# Altium PCB PCB2.PcbDoc
Units mil, origin at the board's own origin, x right, y up, seen from the top; angles counter-clockwise.
Board outline 1580 x 2895 mil, 2 copper layers (Top Layer, Bottom Layer); 23 components, 53 nets, 148 pads, 8 vias.
Unrouted connection lines stored in the file: 27.
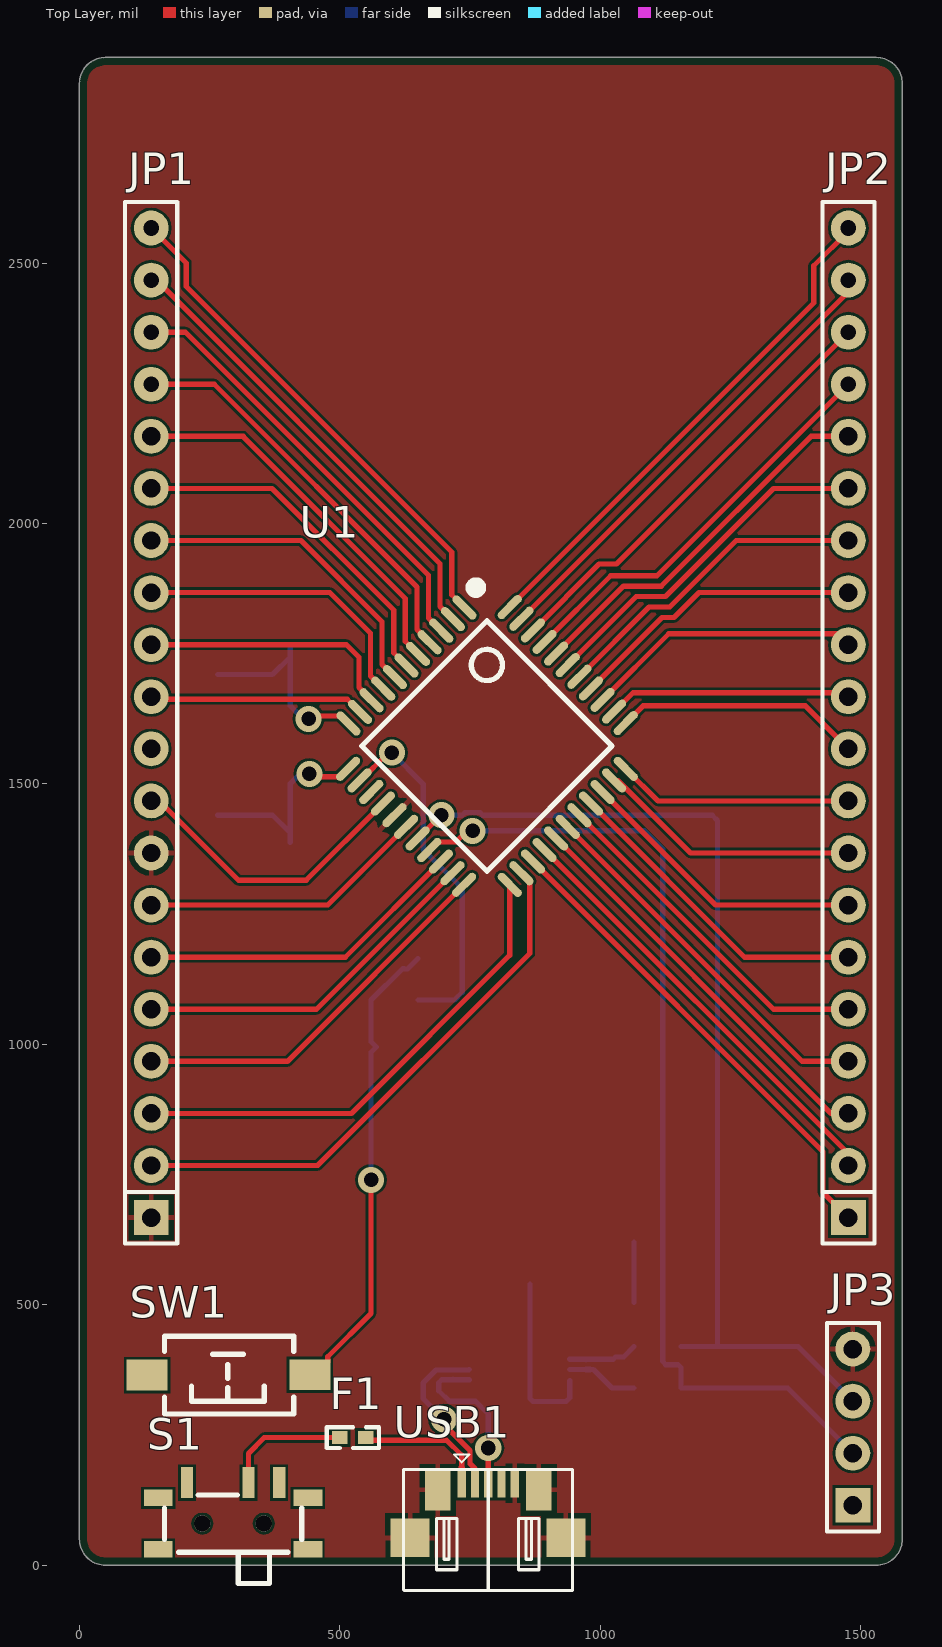
[diagram p0: Top Layer view]
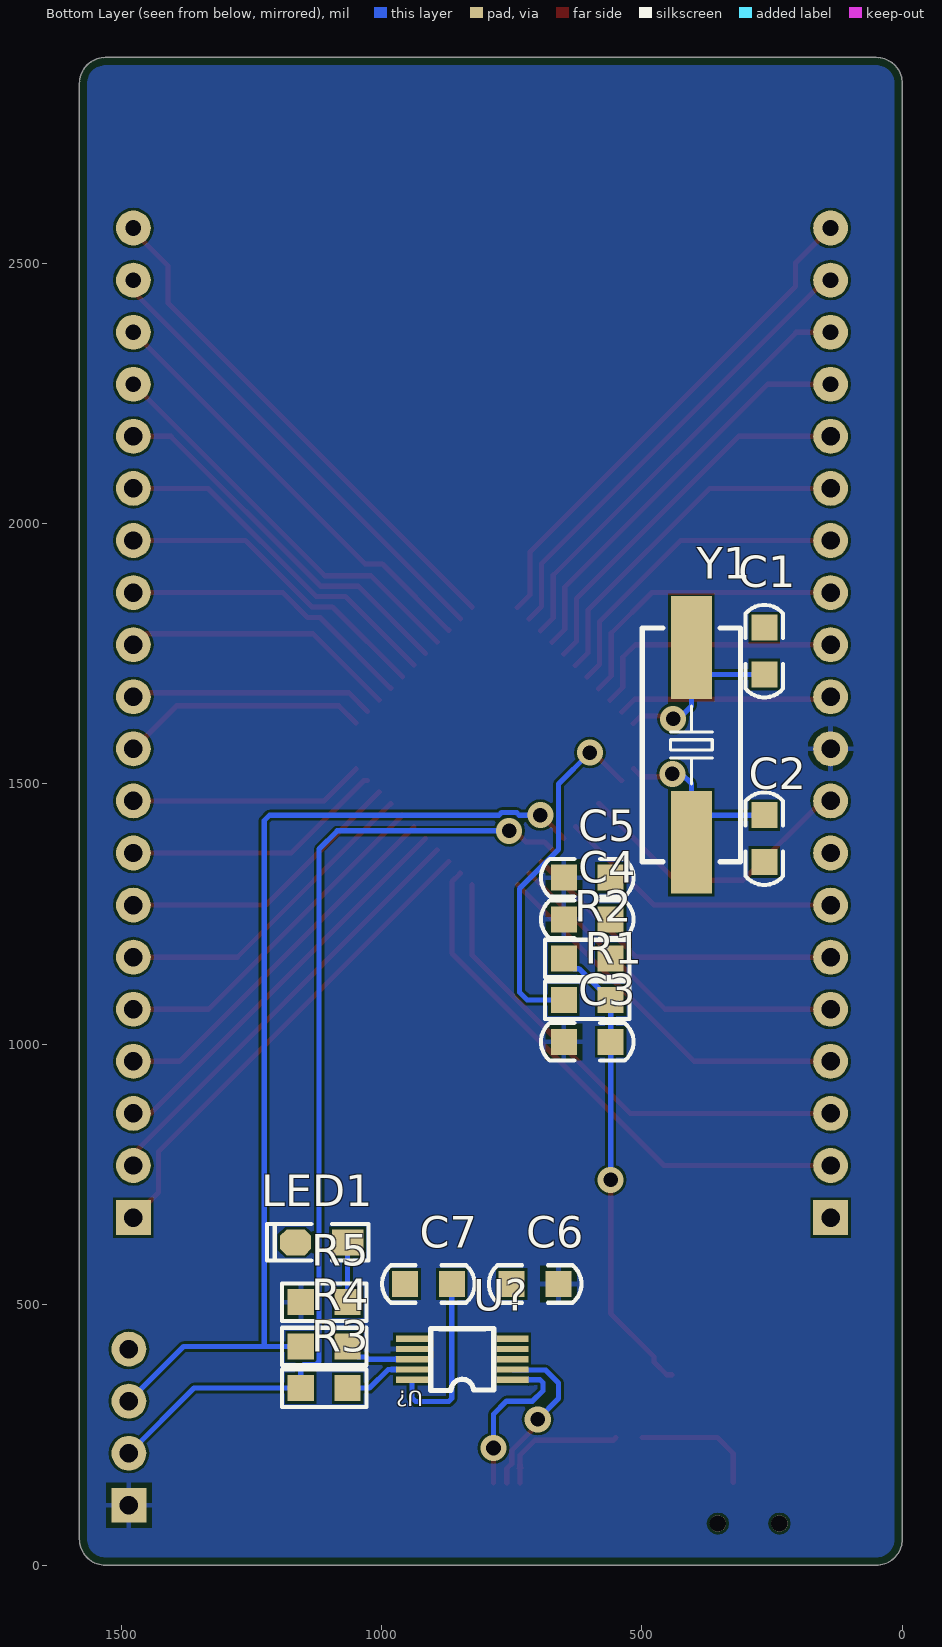
[diagram p1: Bottom Layer view, seen from below]

## Layer stack, top to bottom
Top Solder: solder mask 0.4, Solder Resist, Dk 3.5
Top Layer: signal copper 1.4
Dielectric 1: dielectric 12.6, FR-4, Dk 4.8
Bottom Layer: signal copper 1.4
Bottom Solder: solder mask 0.4, Solder Resist, Dk 3.5

## Board outline
0,50 0,2845 cw(c50,2845) 50,2895 1530,2895 cw(c1530,2845) 1580,2845 1580,50 cw(c1530,50) 1530,0 50,0 cw(c50,50)

## Design rules (kind name [scope] priority, off if disabled: settings)
BoardOutlineClearance [All] p1: gap=15 ignorepadtopadclearanceinfootprint=FALSE
Clearance [All] p1: gap=5 ignorepadtopadclearanceinfootprint=FALSE
PolygonConnect [All] p1: connectstyle=Relief reliefconductorwidth=10 reliefentries=4 polygonreliefangle="90 Angle" airgapwidth=10
RoutingVias [All] p1: holewidth=28 width=50 viastyle="Through Hole" minholewidth=28 minwidth=50 maxholewidth=28 maxwidth=50
SolderMaskExpansion [All] p1: expansion=4
Width [All] p1: maxlimit=10 minlimit=10 preferedwidth=10
30 further rules are at their usual default settings.

## Components (designator, comment, footprint, x,y, rotation, side; value= is the part's Value field where it differs from the comment)
C1 "22pF" "C 0805" 265,1755 r270 bottom
C2 "22pF" "C 0805" 265,1395 r90 bottom
C3 "0.1uF" "C 0805" 605,1005 r0 bottom
C4 "47pF" "C 0805" 605,1240 r0 bottom
C5 "0.1uF" "C 0805" 605,1320 r0 bottom
C6 "10uF" "C 0805" 705,540 r0 bottom
C7 "100nF" "C 0805" 910,540 r0 bottom
F1 "MSMD200-8V 2A" "FU 0402" 525,245 r180 top
JP1 "HDR-1X20" HDR-1X20 137.8,667.44 r90 top
JP2 "HDR-1X20" HDR-1X20 1476.38,667.44 r90 top
JP3 "HDR-1X4" HDR-1X4 1485,115 r90 top
LED1 "红色" "LED 0805G" 1115,620 r0 bottom
R1 "300R" "R 0805" 605,1085 r180 bottom
R2 "10K" "R 0805" 605,1165 r180 bottom
R3 "1K" "R 0805" 1110,340 r0 bottom
R4 "1K" "R 0805" 1110,420 r0 bottom
R5 "1K" "R 0805" 1110,505 r180 bottom
S1 "SS-12F23" MSK-12C01-07 295,80 r0 top
SW1 "3x6x5" "TSW SMD-3*6*2.5" 285,365 r180 top
U1 "STC15F2K60S2" "LQFP44 10X10_L" 782.4,1572.95 r225 top
U? "CH340E" CH340E 845,395 r0 bottom
USB1 "USB-Micro" USB-MICRO_A 785,65 r0 top
Y1 "12MHz" "OSC HC-49SMD" 405,1575 r90 bottom

## Footprints (in the part's own frame and the unit in brackets; to place one, negate y for a bottom-side part, rotate by r counter-clockwise, add the part's x,y. Pads: shape width x height; smd on the part's side, far side on the other; paste and mask are expansions set on the pad)
"C 0805" [mil] "无极性贴片电容"
  rect 50x50 smd: 1(-45,0) 2(45,0)
  silkscreen extent -89,-36 89,36, body extent -39,-24 39,24, height 20
CH340E [mil]
  rect 61.02x12 smd: 1(-96.5,38.87) 2(-96.5,19.18) 3(-96.5,-0.5) 4(-96.5,-20.19) 5(-96.5,-39.87) 6(96.5,-39.87) 7(96.5,-20.19) 8(96.5,-0.5) 9(96.5,19.18) 10(96.5,38.87)
  silkscreen extent -60,-60 60,60
"FU 0402" [mil] "贴片保险丝"
  rect 30x25 smd: 1(-25,0) 2(25,0)
  silkscreen extent -50,-20 50,20, body extent -20,-10 20,10, height 15
HDR-1X4 [mm] "排针，4脚"
  rect 1.7x1.7 hole 0.9: 1(0,0)
  round 1.7 hole 0.9: 2(2.54,0) 3(5.08,0) 4(7.62,0)
  silkscreen extent -1.27,-1.27 8.89,1.27, body extent -1.27,-1.27 8.89,1.27, height 8.5
HDR-1X20 [mm] "排针，20脚"
  rect 1.7x1.7 hole 0.9: 1(0,0)
  round 1.7 hole 0.9: 2(2.54,0) 3(5.08,0) 4(7.62,0) 5(10.16,0) 6(12.7,0) 7(15.24,0) 8(17.78,0) 9(20.32,0) 10(22.86,0) 11(25.4,0) 12(27.94,0) 13(30.48,0) 14(33.02,0) 15(35.56,0) 16(38.1,0)
  round 1.7 hole 0.762: 17(40.64,0) 18(43.18,0) 19(45.72,0) 20(48.26,0)
  silkscreen extent -1.27,-1.27 49.53,1.27, body extent -1.27,-1.27 49.53,1.27, height 8.5
"LED 0805G" [mil] "绿色0805LED"
  rect 60x50 smd: 1(-50,0)
  oct 60x50 smd: 2(50,0)
  silkscreen extent -90,-35 105,35, body extent -39,-25 39,25, height 32
"LQFP44 10X10_L" [mm] "44脚，体宽10x10mm，脚距0.8mm"
  oval 0.4x1.5 smd: 1(-4,-5.551) 2(-3.2,-5.551) 3(-2.4,-5.551) 4(-1.6,-5.551) 5(-0.8,-5.551) 6(0,-5.551) 7(0.8,-5.551) 8(1.6,-5.551) 9(2.4,-5.551) 10(3.2,-5.551) 11(4,-5.551) 23(4,5.578) 24(3.2,5.578) 25(2.4,5.578) 26(1.6,5.578) 27(0.8,5.578) 28(0,5.578) 29(-0.8,5.578) 30(-1.6,5.578) 31(-2.4,5.578) 32(-3.2,5.578) 33(-4,5.578)
  oval 1.5x0.4 smd: 12(5.575,-4) 13(5.575,-3.2) 14(5.575,-2.4) 15(5.575,-1.6) 16(5.575,-0.8) 17(5.575,0) 18(5.575,0.8) 19(5.575,1.6) 20(5.575,2.4) 21(5.575,3.2) 22(5.575,4) 34(-5.575,4) 35(-5.575,3.2) 36(-5.575,2.4) 37(-5.575,1.6) 38(-5.575,0.8) 39(-5.575,0) 40(-5.575,-0.8) 41(-5.575,-1.6) 42(-5.575,-2.4) 43(-5.575,-3.2) 44(-5.575,-4)
  silkscreen extent -5.33,-6.09 4.32,4.32, body extent -6,-6 6,6, height 1.45
MSK-12C01-07 [mm] "6.7*2.8*1.5mm(长宽高）"
  rect 1.4x0.8 smd: 0(-3.65,-1.25) 0(-3.65,1.25) 0(3.65,-1.25) 0(3.65,1.25)
  rect 0.6x1.5 smd: 1(-2.25,1.996) 2(0.75,1.996) 3(2.25,1.996)
  round 0.8 hole 0.8: " "(-1.5,0) " "(1.5,0)
  silkscreen extent -3.35,-2.92 3.35,1.4, body extent -3.92,-2.9 3.92,2.4, height 1.5
"OSC HC-49SMD" [mm]
  rect 5x2 smd: 1(-4.75,0) 2(4.75,0)
  silkscreen extent -5.7,-2.4 5.7,2.4, body extent -6.5,-2.33 6.5,2.32, height 4.63
"R 0805" [mil] "1/8W贴片电阻"
  rect 50x50 smd: 1(-45,0) 2(45,0)
  silkscreen extent -81,-36 81,36, body extent -39,-25 39,25, height 20
"TSW SMD-3*6*2.5" [mm] "3*6*2.5mm"
  rect 2x1.5 smd: 1(-3.996,-0.02) 2(3.937,0)
  silkscreen extent -3.21,-1.9 3.09,1.9, body extent -4,-1.88 4,1.62, height 2.59
USB-MICRO_A [mm] "micro型USB ，5.9*8.2*2.5mm"
  rect 0.4x1.4 smd: 1(-1.296,2.355) 2(-0.648,2.355) 3(0,2.355) 4(0.648,2.355) 5(1.295,2.355)
  rect 1.9x1.9 smd: 5(-3.81,-0.312) 5(3.784,-0.312)
  rect 1.25x2 smd: 5(-2.464,2.025) 5(2.464,2.025)
  silkscreen extent -4.14,-2.89 4.11,3.75, body extent -3.98,-2.77 3.98,2.65, height 2.69

## Part data
C1 C2 C3 C4 C5 C6 C7: library part C, "无极性贴片电容"
F1: library part FU, "贴片保险丝"
JP1 JP2: library part "Header 20", "20P接插件", BOM名称=20P, 学习资源=https://lmdzstyle.taoba
JP3: library part "Header 4", "4P接插件"
LED1: library part LED-SMD, "贴片LED", BOM名称=Ì, 学习资源=https://lmdzstyle.taoba
R1 R2 R3 R4 R5: library part R, "贴片电阻"
S1: library part SSW-1P, "1路波动开关", BOM名称=², 学习资源=https://lmdzstyle.taoba
SW1: library part "TSW 3x6", "3x6轻触开关", BOM名称=3x6Ç, 学习资源=https://lmdzstyle.taoba
U1: library part STC15F2K60S2-44pin, "STC单片机"
Y1: library part XTAL-2P, "2脚无源脚晶振", BOM名称=2脚, 学习资源=www.oooc
USB1: BOM名称=USBMic

## Via types
v1: diameter 50, hole 28, Top Layer to Bottom Layer, 8 vias

## Nets (pads, with @x,y where several pads share a name; then routed paths per layer and width w, separated by ;. In a path a pad name is that pad's centre, name@x,y a point inside that pad or via, vN(x,y) a via of type N, cw(c..) or ccw(c..) an arc to the next point about the centre after c; other vN are vias at no path point)
+5: C3.2 C4.2 C5.2 C6.1 JP1.10 JP3.1 R5.1 S1.1 SW1.2 U1.14 U?.7
D+: U?.1 USB1.3 | length 322.1
  Top Layer w10: USB1.3 v1(785,225)
  Bottom Layer w10: U?.1 695.86,356.13 690,350.27 690,335 710,315 760,315 785,290 v1(785,225)
D-: U?.2 USB1.2 | length 332.7
  Top Layer w10: v1(700,280) 700,270 750,220 750,195 759.49,185.51 USB1.2
  Bottom Layer w10: v1(700,280) 660,320 660,350 684.82,374.82 747.5,374.82 U?.2
GND: C1.1 C2.1 C4.1 C5.1 C6.2 C7.2 JP1.1 JP1.8 JP3.4 LED1.2 R2.2 U1.16 U?.3 USB1.5
NetC1_2: C1.2 U1.11 Y1.2 | length 396.2
  Top Layer w10: v1(440,1625) 445.34,1630.34 502.31,1630.34 U1.11
  Bottom Layer w10: C1.2 370.63,1710 Y1.2@405,1744.37 ; Y1.2 Y1.2@405,1744.37 ; v1(440,1625) 430,1625 405,1650 Y1.2@405,1744.37
NetC2_2: C2.2 U1.12 Y1.1 | length 394.2
  Top Layer w10: v1(441.42,1519.4) 447.02,1513.81 500.54,1513.81 U1.12
  Bottom Layer w10: C2.2 370.63,1440 Y1.1@405,1405.63 ; Y1.1 Y1.1@405,1405.63 ; v1(441.42,1519.4) 423.74,1519.4 405,1500.66 Y1.1@405,1405.63
NetC3_1: C3.1 R1.2 R2.1 SW1.1 | length 905.1
  Top Layer w10: SW1.1 452.16,365.79 476.68,390.31 476.68,400.16 560,483.47 v1(560,740)
  Bottom Layer w10: v1(560,740) 560,985 570,995 C3.1 R1.2 620,1145 630,1145 R2.1
NetC7_1: C7.1 U?.10 | length 335.3
  Bottom Layer w10: C7.1 865,320 870.86,314.14 934.14,314.14 941.5,321.5 U?.10@941.5,354.82
NetF1_1: F1.1 USB1.1 | length 251.4
  Top Layer w10: F1.1 555,240 705,240 733.99,211.01 USB1.1
NetF1_2: F1.2 S1.2 | length 244
  Top Layer w10: S1.2 324.53,214.53 355,245 F1.2
NetLED1_1: LED1.1 R5.2 | length 115
  Bottom Layer w10: R5.2 LED1.1
NetR1_1: R1.1 U1.13 | length 691
  Top Layer w10: U1.13 539.68,1506.85 592.84,1560 v1(600,1560)
  Bottom Layer w10: v1(600,1560) 660,1500 660,1374.14 735,1299.14 735,1100 720,1085 R1.1
NetR3_1: R3.1 U?.9 | length 138.3
  Bottom Layer w10: U?.9 987.01,375.82 1022.83,340 R3.1
NetR4_1: R4.1 U?.8 | length 133.6
  Bottom Layer w10: U?.8 1025,395.5 1029.5,400 1045,400 R4.1
P0_0: JP2.16 U1.40 | length 733.8
  Top Layer w10: U1.40 1044.72,1879.82 1117.04,1879.82 1404.66,2167.44 JP2.16
P0_1: JP2.17 U1.41 | length 788.3
  Top Layer w10: U1.41 1020.18,1899.82 1108.75,1899.82 JP2.17
P0_2: JP2.18 U1.42 | length 842.7
  Top Layer w10: U1.42 997.91,1922.09 1031.03,1922.09 JP2.18
P0_3: JP2.19 U1.43 | length 910.3
  Top Layer w10: U1.43 1476.38,2445.1 JP2.19
P0_4: JP2.20 U1.44 | length 1008.6
  Top Layer w10: U1.44 1410,2423.26 1410,2495 JP2.20@1476.38,2561.38 ; JP2.20@1476.38,2550 JP2.20@1476.38,2561.38 ; JP2.20 JP2.20@1476.38,2561.38
P0_5: JP1.20 U1.1 | length 977.7
  Top Layer w10: JP1.20 205,2500.24 205,2455 714.81,1945.19 714.81,1863.25 U1.1
P0_6: JP1.19 U1.2 | length 896.8
  Top Layer w10: JP1.19 148.02,2467.44 692.54,1922.91 692.54,1840.98 U1.2
P0_7: JP1.18 U1.3 | length 842.3
  Top Layer w10: JP1.18 203.47,2367.44 670.27,1900.64 670.27,1818.71 U1.3
P1_0: JP1.17 U1.4 | length 787.8
  Top Layer w10: JP1.17 258.93,2267.44 648,1878.37 648,1796.44 U1.4
P1_1: JP1.16 U1.5 | length 733.4
  Top Layer w10: JP1.16 314.39,2167.44 625.73,1856.1 625.73,1774.17 U1.5
P1_2: JP1.14 U1.7 | length 624.4
  Top Layer w10: JP1.14 425.31,1967.44 581.19,1811.56 581.19,1729.62 U1.7
P1_3: JP1.13 U1.8 | length 570
  Top Layer w10: JP1.13 480.76,1867.44 558.92,1789.29 558.92,1707.35 U1.8
P1_4: JP1.12 U1.9 | length 501.6
  Top Layer w10: JP1.12 512.56,1767.44 536.65,1743.35 536.65,1685.08 U1.9
P1_5: JP1.11 U1.10 | length 413
  Top Layer w10: JP1.11 142.43,1662.81 514.37,1662.81 U1.10
P2_0: JP2.6 U1.30 | length 616.3
  Top Layer w10: U1.30 1277,1167.44 JP2.6
P2_1: JP2.7 U1.31 | length 561.8
  Top Layer w10: U1.31 1221.54,1267.44 JP2.7
P2_2: JP2.8 U1.32 | length 507.3
  Top Layer w10: U1.32 1033.84,1506.76 1173.15,1367.44 JP2.8
P2_3: JP2.9 U1.33 | length 452.9
  Top Layer w10: U1.33 1110.62,1467.44 JP2.9
P2_4: JP2.10 U1.34 | length 475.4
  Top Layer w10: U1.34 1082.16,1650 1393.82,1650 JP2.10
P2_5: JP2.11 U1.35 | length 467.7
  Top Layer w10: U1.35 1062.62,1675 1468.82,1675 JP2.11
P2_6: JP2.12 U1.36 | length 533.3
  Top Layer w10: U1.36 1131.54,1788.46 1455.36,1788.46 JP2.12
P2_7: JP2.13 U1.37 | length 570.4
  Top Layer w10: U1.37 1118.35,1819.82 1141.89,1819.82 1189.51,1867.44 JP2.13
P3_2: JP1.6 U1.20 | length 632.2
  Top Layer w10: JP1.6 510.52,1167.44 U1.20
P3_3: JP1.5 U1.21 | length 686.7
  Top Layer w10: JP1.5 455.06,1067.44 U1.21
P3_4: JP1.4 U1.22 | length 741.2
  Top Layer w10: JP1.4 399.6,967.44 U1.22
P3_5: JP1.3 U1.23 | length 949.4
  Top Layer w10: JP1.3 522.44,867.44 826.33,1171.33 U1.23
P3_6: JP1.2 U1.24 | length 1056
  Top Layer w10: JP1.2 457.44,767.44 864.51,1174.51 864.51,1312.67 U1.24
P3_7: JP2.1 U1.25 | length 934.2
  Top Layer w10: U1.25 1427.91,793.81 1427.91,715.91 JP2.1
P4_0: JP1.7 U1.17 | length 551.7
  Top Layer w10: JP1.7 476.89,1267.44 U1.17
P4_1: JP2.2 U1.26 | length 847.3
  Top Layer w10: U1.26 1476.38,789.89 JP2.2
P4_2: JP2.3 U1.27 | length 779.7
  Top Layer w10: U1.27 1443.37,867.44 JP2.3
P4_3: JP2.4 U1.28 | length 725.2
  Top Layer w10: U1.28 1387.91,967.44 JP2.4
P4_4: JP2.5 U1.29 | length 670.7
  Top Layer w10: U1.29 1332.46,1067.44 JP2.5
P4_5: JP2.14 U1.38 | length 624.9
  Top Layer w10: U1.38 1093.81,1839.82 1133.61,1839.82 1261.23,1967.44 JP2.14
P4_6: JP2.15 U1.39 | length 679.3
  Top Layer w10: U1.39 1069.27,1859.82 1125.32,1859.82 1332.95,2067.44 JP2.15
P4_7: JP1.15 U1.6 | length 678.9
  Top Layer w10: JP1.15 369.85,2067.44 603.46,1833.83 603.46,1751.9 U1.6
P5_5: JP1.9 U1.15 | length 569
  Top Layer w10: JP1.9 153.2,1467.44 305.64,1315 435.36,1315 U1.15
RXD: JP3.3 R4.2 U1.18 | length 1985.7
  Top Layer w10: U1.18 693.99,1440 v1(695,1440)
  Bottom Layer w10: v1(695,1440) 735.5,1440 740.5,1445 769.5,1445 774.5,1440 1215,1440 1225,1430 1225,420 ; R4.2 1225,420 ; JP3.3 1380,420 1225,420
TXD: JP3.2 R3.2 U1.19 | length 1922.9
  Top Layer w10: U1.19 687.06,1388.53 722.71,1388.53 744.18,1410 v1(755,1410)
  Bottom Layer w10: v1(755,1410) 1085,1410 1120,1375 1120,390.86 1125.86,385 1149.14,385 1155,379.14 R3.2 1360,340 JP3.2
pads on no net: "S1. " S1.0 S1.3 U?.4 U?.5 U?.6 USB1.4

## Polygon pours and split planes (outlines as drawn)
GND on Top Layer "Top Layer-No Net" (solid, remove dead copper, pour order 0): 0,50 0,2845 cw(c50,2845) 50,2895 1530,2895 cw(c1530,2845) 1580,2845 1580,50 cw(c1530,50) 1530,0 50,0 cw(c50,50)
+5 on Bottom Layer "Top Layer-No Net1" (solid, remove dead copper, pour order 1): 0,50 0,2845 cw(c50,2845) 50,2895 1530,2895 cw(c1530,2845) 1580,2845 1580,50 cw(c1530,50) 1530,0 50,0 cw(c50,50)

## Silkscreen, mask and mechanical layers (free items; w line width, h text height)
Mechanical 1:
  the board outline again, w10